# Altium PCB GSH_Bed v1.0.PcbDoc (part 4 of 6)
Units mil, origin at the board's own origin, x right, y up, seen from the top; angles counter-clockwise.
Board outline 4724.41 x 4921.3 mil, 2 copper layers (Top Layer, Bottom Layer); 2 components, 3 nets, 5 pads, 0 vias.
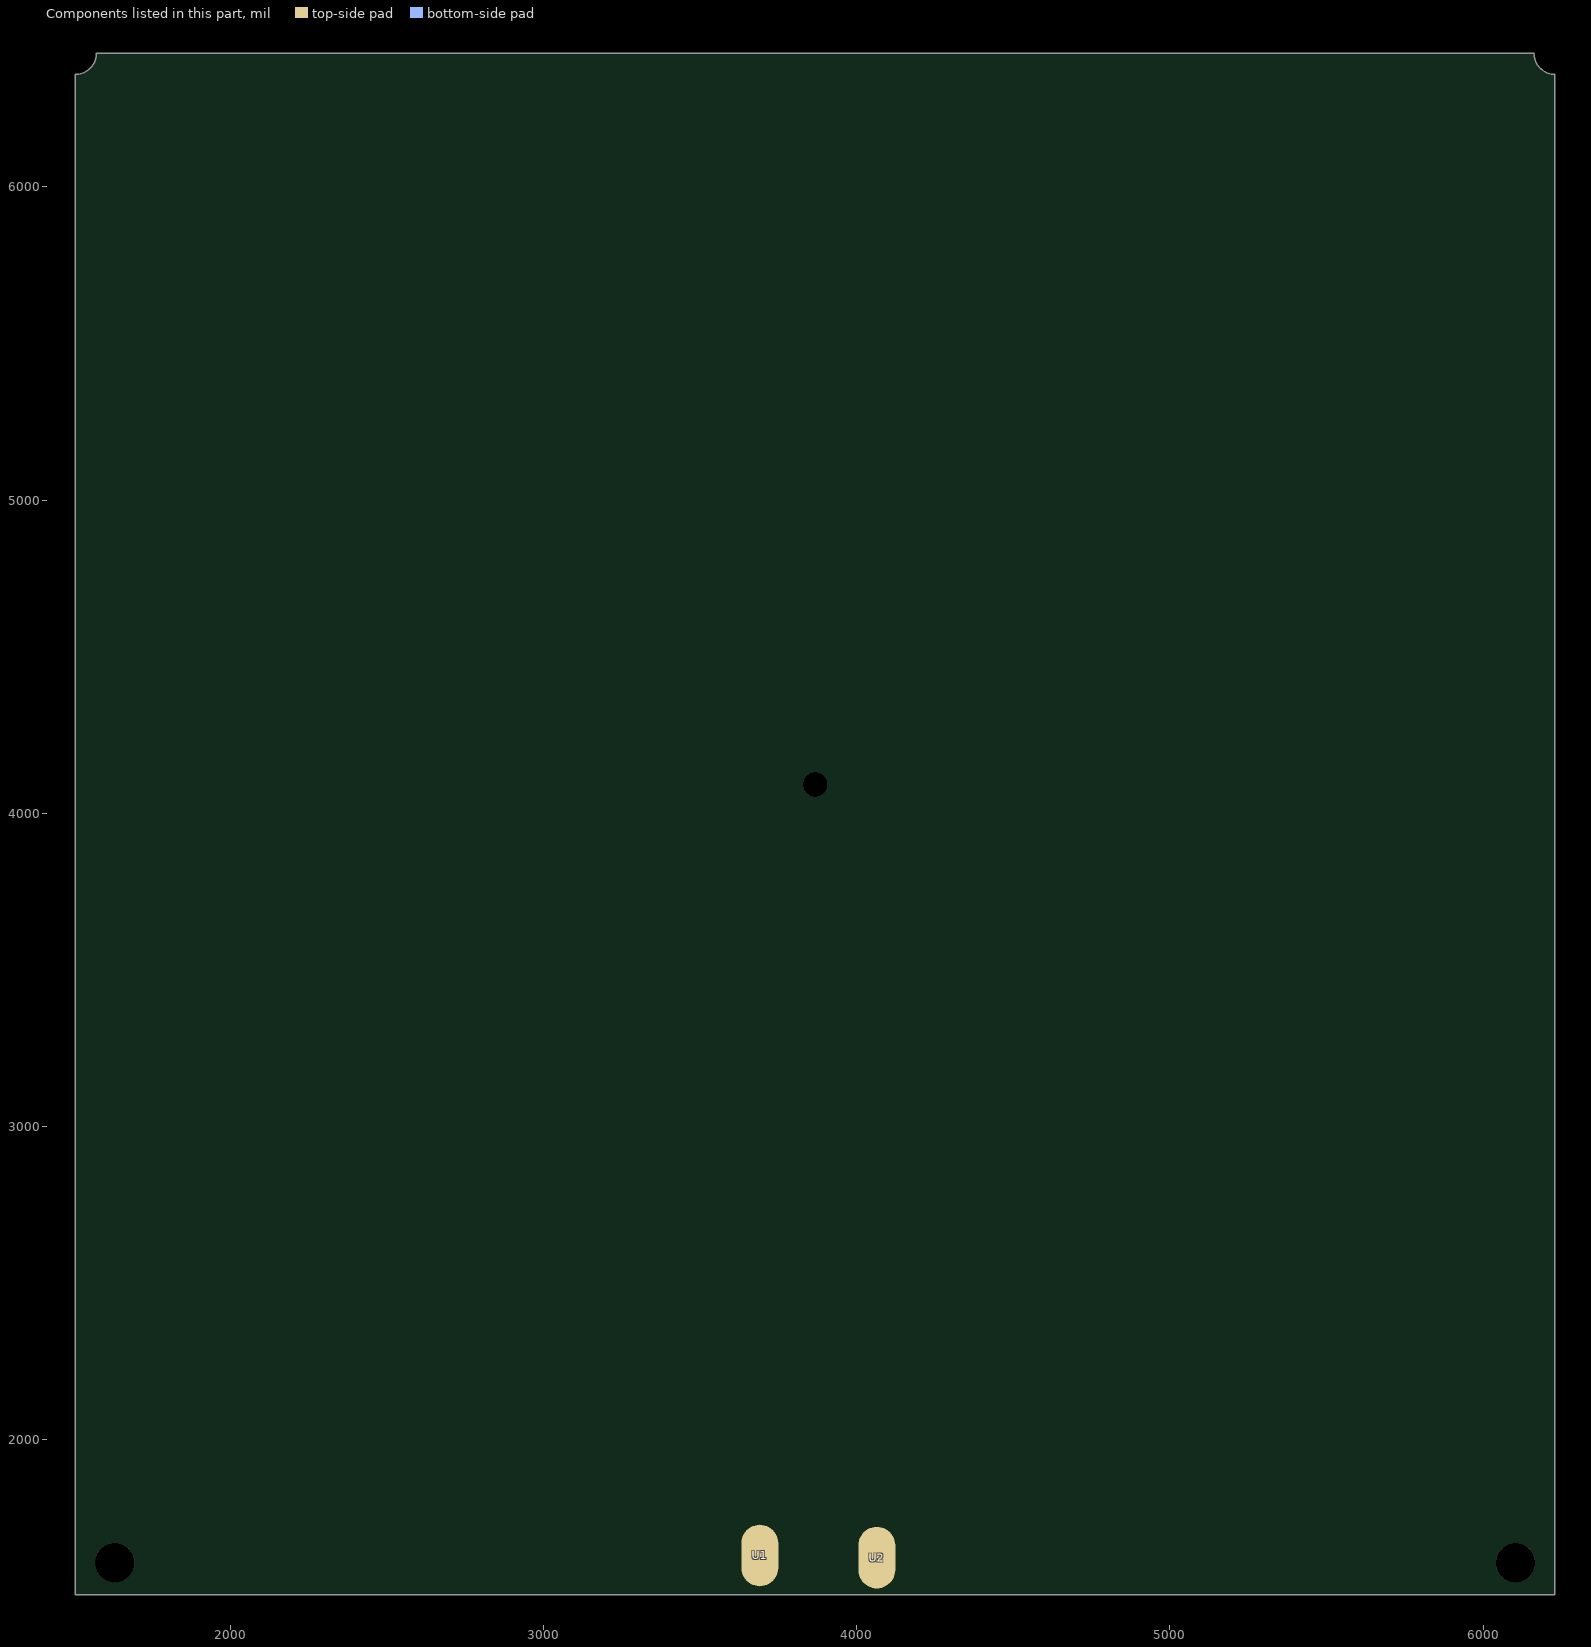
[diagram p4: the components of this part, seen from the top]

## Nets (pads, with @x,y where several pads share a name; then routed paths per layer and width w, separated by ;. In a path a pad name is that pad's centre, name@x,y a point inside that pad or via, vN(x,y) a via of type N, cw(c..) or ccw(c..) an arc to the next point about the centre after c; other vN are vias at no path point) (continued)
copper on no net: (continued)
  Top Layer w25.59: 3318.04,4737.17 3353.48,4737.17 3353.48,4701.73 3318.04,4701.73 3318.04,4630.87 3353.48,4630.87 3353.48,4666.3 3388.91,4666.3 3388.91,4630.87 3424.34,4630.87 3424.34,4701.73 3388.91,4701.73 3388.91,4737.17 3424.34,4737.17 3495.21,4737.17 3495.21,4701.73 3459.77,4701.73 3459.77,4630.86 3495.21,4630.86 3495.21,4666.29 3530.64,4666.29 3530.64,4630.86 3566.07,4630.86 3566.07,4701.73 3530.64,4701.73 3530.64,4737.16 3566.07,4737.16 3566.07,4808.03 3530.64,4808.03 3530.64,4772.6 3459.77,4772.6 3459.77,4808.03 3495.21,4808.03 3495.21,4843.46 3459.77,4843.46 3459.77,4878.89 3530.64,4878.89 3530.64,4843.46 3566.07,4843.46 3566.07,4878.89 3601.51,4878.89 3601.51,4843.47 3636.94,4843.47 3636.94,4878.89 3707.81,4878.89 3707.81,4843.47 3672.37,4843.47 3672.37,4808.03 3707.81,4808.03 3707.81,4772.6 3636.94,4772.6 3636.94,4808.03 3601.5,4808.03 3601.5,4737.17 3636.93,4737.17 3636.93,4701.72 3601.5,4701.72 3601.5,4630.86 3636.93,4630.86 3636.93,4666.29 3672.37,4666.29 3672.37,4630.86 3707.81,4630.86 3707.81,4701.72 3672.37,4701.72 3672.37,4737.16 3707.8,4737.16 3778.67,4737.16 3778.67,4701.72 3743.23,4701.72 3743.23,4630.85 3778.67,4630.85 3778.67,4666.29 3814.1,4666.29 3814.1,4630.85 3849.53,4630.85 3849.53,4701.72 3814.1,4701.72 3814.1,4737.16 3849.53,4737.16 3849.53,4808.02 3814.1,4808.02 3814.1,4772.59 3743.23,4772.59 3743.23,4808.02 3778.66,4808.02 3778.66,4843.45 3743.23,4843.45 3743.23,4878.89 3814.1,4878.89 3814.1,4843.45 3849.54,4843.45 3849.54,4878.89 3849.54,4914.32 3814.1,4914.32 3814.1,4949.76 3849.54,4949.76 3849.54,5020.62 3814.1,5020.62 3814.1,4985.19 3778.67,4985.19 3778.67,5020.62 3743.23,5020.62 3743.23,4949.76 3778.67,4949.76 3778.67,4914.33 3707.81,4914.33 3707.81,4949.76 3672.37,4949.76 3672.37,4914.32 3601.51,4914.32 3601.51,4949.76 3636.93,4949.76 3636.93,4985.19 3601.51,4985.19 3601.51,5020.62 3672.37,5020.62 3672.37,4985.19 3707.81,4985.19 3707.81,5056.06 3707.81,5091.49 3672.37,5091.49 3672.37,5056.05 3601.51,5056.05 3601.51,5091.49 3636.94,5091.49 3636.94,5126.92 3601.51,5126.92 3601.51,5162.36 3672.37,5162.36 3672.37,5126.92 3707.81,5126.92 3707.81,5162.36 3778.68,5162.36 3778.68,5126.92 3743.24,5126.92 3743.24,5056.05 3778.68,5056.05 3778.68,5091.48 3814.11,5091.48 3814.11,5056.05 3849.55,5056.05 3849.55,5126.92 3814.11,5126.92 3814.11,5162.35 3849.54,5162.35 3849.55,5233.21 3814.12,5233.21 3814.12,5197.78 3743.26,5197.78 3743.26,5233.21 3778.68,5233.21 3778.68,5268.65 3743.26,5268.65 3743.26,5304.08 3814.12,5304.08 3814.12,5268.65 3849.56,5268.65 3849.56,5339.51 3814.12,5339.51 3814.12,5374.95 3849.56,5374.95 3849.56,5445.81 3814.12,5445.81 3814.12,5410.38 3778.69,5410.38 3778.69,5445.81 3743.26,5445.81 3743.26,5374.95 3778.69,5374.95 3778.69,5339.51 3743.26,5339.51 3672.39,5339.51 3672.39,5374.95 3707.83,5374.95 3707.83,5445.82 3672.39,5445.82 3672.39,5410.39 3636.96,5410.39 3636.96,5445.82 3601.53,5445.82 3601.53,5374.95 3636.96,5374.95 3636.96,5339.52 3601.53,5339.52 3601.53,5268.65 3636.96,5268.65 3636.96,5304.09 3707.83,5304.09 3707.83,5268.65 3672.39,5268.65 3672.39,5233.22 3707.83,5233.22 3707.83,5197.79 3636.96,5197.79 3636.96,5233.22 3601.52,5233.22 3601.52,5197.79 3566.09,5197.79 3530.66,5197.79 3530.66,5233.23 3566.09,5233.23 3566.09,5304.09 3530.66,5304.09 3530.66,5268.66 3495.22,5268.66 3495.22,5304.09 3459.79,5304.09 3459.79,5233.23 3495.22,5233.23 3495.22,5197.79 3424.36,5197.79 3424.36,5233.23 3388.92,5233.23 3388.92,5197.79 3318.06,5197.79 3318.06,5233.23 3353.49,5233.23 3353.49,5268.65 3318.06,5268.65 3318.06,5304.09 3388.92,5304.09 3388.92,5268.65 3424.36,5268.65 3424.36,5339.52 3424.36,5374.95 3388.93,5374.95 3388.93,5339.52 3318.07,5339.52 3318.07,5374.95 3353.49,5374.95 3353.49,5410.39 3318.07,5410.39 3318.07,5445.82 3388.93,5445.82 3388.93,5410.39 3424.37,5410.39 3424.37,5445.82 3495.23,5445.82 3495.23,5410.38 3459.8,5410.38 3459.8,5339.52 3495.23,5339.52 3495.23,5374.95 3530.67,5374.95 3530.67,5339.52 3566.1,5339.52 3566.1,5410.38 3530.67,5410.38 3530.67,5445.82 3566.1,5445.81 3566.1,5481.25 3530.66,5481.25 3530.66,5516.69 3566.1,5516.69 3566.1,5587.55 3530.66,5587.55 3530.66,5552.12 3495.23,5552.12 3495.23,5587.55 3459.8,5587.55 3459.8,5516.69 3495.23,5516.69 3495.23,5481.25 3424.36,5481.25 3424.36,5516.68 3388.93,5516.68 3388.93,5481.25 3318.07,5481.25 3318.07,5516.68 3353.5,5516.68 3353.5,5552.12 3318.07,5552.12 3318.07,5587.55 3388.93,5587.55 3388.93,5552.12 3424.37,5552.12 3424.37,5622.98 3424.37,5658.42 3388.93,5658.42 3388.93,5622.98 3318.07,5622.98 3318.07,5658.42 3353.5,5658.42 3353.5,5693.85 3318.07,5693.85 3318.07,5729.28 3388.93,5729.28 3388.93,5693.85 3424.37,5693.85 3424.37,5729.28 ; 3318.04,4737.18 3318.04,4808.04 3353.48,4808.04 3353.48,4772.6 3424.34,4772.6 3424.34,4808.04 3388.91,4808.04 3388.91,4843.47 3424.34,4843.47 3424.34,4878.9 3353.48,4878.9 3353.48,4843.47 3318.05,4843.47 3318.05,4914.34 3353.48,4914.33 3353.48,4949.77 3318.05,4949.77 3318.05,5020.63 3353.48,5020.63 3353.48,4985.2 3388.91,4985.2 3388.91,5020.63 3424.35,5020.63 3424.35,4949.77 3388.91,4949.77 3388.91,4914.33 3459.78,4914.33 3459.78,4949.76 3495.22,4949.76 3495.22,4914.33 3566.08,4914.33 3566.08,4949.76 3530.65,4949.76 3530.65,4985.2 3566.08,4985.2 3566.08,5020.63 3495.22,5020.63 3495.22,4985.2 3459.79,4985.2 3459.79,5020.63 3459.79,5091.5 3495.22,5091.5 3495.22,5056.06 3566.09,5056.06 3566.09,5091.5 3530.66,5091.5 3530.66,5126.93 3566.09,5126.93 3566.09,5162.36 3495.22,5162.36 3495.22,5126.93 3459.79,5126.93 3459.79,5162.36 3388.92,5162.36 3388.92,5126.93 3424.36,5126.93 3424.36,5056.06 3388.92,5056.06 3388.92,5091.49 3353.49,5091.49 3353.49,5056.06 3318.06,5056.06 3318.06,5126.93 3353.49,5126.93 3353.49,5162.37 3318.06,5162.37 3282.63,5162.37 3282.63,5126.93 3247.19,5126.93 3247.19,5162.37 3176.32,5162.37 3176.32,5126.93 3211.76,5126.93 3211.76,5091.5 3176.32,5091.5 3176.32,5056.07 3247.19,5056.07 3247.19,5091.5 3282.62,5091.5 3282.62,5020.63 3247.19,5020.63 3247.19,4985.2 3282.62,4985.2 3282.62,4914.33 3247.19,4914.33 3247.19,4949.77 3211.76,4949.77 3211.76,4914.33 3176.32,4914.33 3176.32,4985.2 3211.76,4985.2 3211.76,5020.64 3140.89,5020.64 3105.46,5020.64 3105.46,4985.2 3140.89,4985.2 3140.89,4914.34 3105.46,4914.34 3105.46,4949.77 3070.03,4949.77 3070.03,4914.34 3034.59,4914.34 3034.59,4985.2 3070.03,4985.2 3070.03,5020.64 3034.59,5020.64 3034.59,5091.51 3070.03,5091.51 3070.03,5056.08 3140.89,5056.08 3140.89,5091.51 3105.47,5091.51 3105.47,5126.94 3140.89,5126.94 3140.89,5162.38 3070.03,5162.38 3070.03,5126.94 3034.6,5126.94 3034.6,5162.38 2963.73,5162.38 2963.73,5126.94 2999.17,5126.94 2999.17,5056.08 2963.73,5056.08 2963.73,5091.51 2928.3,5091.51 2928.3,5056.08 2892.87,5056.08 2892.87,5126.94 2928.3,5126.94 2928.3,5162.38 2857.44,5162.38 2857.43,5126.95 2821.99,5126.95 2821.99,5162.38 2751.13,5162.38 2751.13,5126.95 2786.56,5126.95 2786.56,5091.52 2751.13,5091.52 2751.13,5056.08 2821.99,5056.08 2821.99,5091.52 2857.43,5091.52 2857.43,5056.08 2857.43,4985.22 2821.99,4985.22 2821.99,5020.65 2751.13,5020.65 2751.13,4985.22 2786.56,4985.22 2786.56,4949.78 2751.13,4949.78 2751.13,4914.35 2821.99,4914.35 2821.99,4949.78 2857.43,4949.78 2857.43,4914.35 2928.29,4914.35 2928.29,4949.79 2892.86,4949.79 2892.86,5020.65 2928.29,5020.65 2928.29,4985.22 2963.72,4985.22 2963.72,5020.65 2999.16,5020.65 2999.16,4949.79 2963.72,4949.79 2963.72,4914.35 2999.16,4914.35 2999.16,4878.91 2963.73,4878.92 2963.73,4843.48 2999.16,4843.48 2999.16,4772.62 2963.73,4772.62 2963.73,4808.05 2928.29,4808.05 2928.29,4772.62 2892.86,4772.62 2892.86,4843.48 2928.29,4843.48 2928.29,4878.92 2857.43,4878.92 2857.43,4843.49 2821.99,4843.49 2821.99,4878.92 2751.13,4878.92 2751.13,4843.49 2786.56,4843.49 2786.56,4808.05 2751.13,4808.05 2751.13,4772.62 2821.99,4772.62 2821.99,4808.05 2857.42,4808.05 2857.42,4772.62 2857.42,4701.75 2821.98,4701.75 2821.98,4737.19 2751.12,4737.19 2751.12,4701.75 2786.55,4701.75 2786.55,4666.32 2751.12,4666.32 2751.12,4630.89 2821.98,4630.89 2821.98,4666.32 2857.42,4666.32 2857.42,4630.89 2928.28,4630.89 2928.28,4666.32 2892.85,4666.32 2892.85,4737.19 2928.28,4737.19 2928.28,4701.76 2963.72,4701.76 2963.72,4737.19 2999.15,4737.19 2999.15,4666.32 2963.72,4666.32 2963.72,4630.88 2999.15,4630.88 3034.58,4630.88 3034.58,4666.32 3070.02,4666.32 3070.02,4630.88 3140.89,4630.88 3140.89,4666.32 3105.45,4666.32 3105.45,4701.75 3140.89,4701.75 3140.89,4737.19 3070.02,4737.19 3070.02,4701.75 3034.59,4701.75 3034.59,4772.62 3070.02,4772.62 3070.02,4808.05 3034.59,4808.05 3034.59,4878.92 3070.02,4878.92 3070.02,4843.49 3105.45,4843.49 3105.45,4878.92 3140.89,4878.92 3140.89,4808.05 3105.45,4808.05 3105.45,4772.61 3176.32,4772.61 3211.75,4772.61 3211.75,4808.05 3176.32,4808.05 3176.32,4878.91 3211.75,4878.91 3211.75,4843.48 3247.18,4843.48 3247.18,4878.91 3282.62,4878.91 3282.62,4808.05 3247.18,4808.05 3247.18,4772.61 3282.62,4772.61 3282.62,4701.74 3247.18,4701.74 3247.18,4737.18 3176.32,4737.18 3176.32,4701.74 3211.75,4701.74 3211.75,4666.31 3176.32,4666.31 3176.32,4630.87 3247.18,4630.87 3247.18,4666.31 3282.61,4666.31 3282.61,4595.44 3282.61,4560.01 3247.17,4560.01 3247.17,4595.44 3176.3,4595.44 3176.3,4560.01 3211.73,4560.01 3211.73,4524.58 3176.3,4524.58 3176.3,4489.14 3247.17,4489.14 3247.17,4524.58 3282.6,4524.58 3282.6,4453.71 3247.17,4453.71 3247.17,4418.28 3282.6,4418.28 3282.6,4347.41 3247.17,4347.41 3247.17,4382.85 3211.74,4382.85 3211.74,4347.41 3176.3,4347.41 3176.3,4418.28 3211.74,4418.28 3211.74,4453.72 3140.87,4453.72 3105.44,4453.72 3105.44,4418.28 3140.87,4418.28 3140.87,4347.42 3105.44,4347.42 3105.44,4382.85 3070.01,4382.85 3070.01,4347.42 3034.57,4347.42 3034.57,4418.28 3070.01,4418.28 3070.01,4453.72 3034.57,4453.72 3034.57,4524.59 3070.01,4524.59 3070.01,4489.15 3140.87,4489.15 3140.87,4524.59 3105.44,4524.59 3105.44,4560.02 3140.87,4560.02 3140.87,4595.45 3070.01,4595.45 3070.01,4560.02 3034.58,4560.02 3034.58,4595.45 2963.71,4595.45 2963.71,4560.02 2999.15,4560.02 2999.15,4489.16 2963.71,4489.16 2963.71,4524.59 2928.28,4524.59 2928.28,4489.16 2892.84,4489.16 2892.84,4560.02 2928.28,4560.02 2928.28,4595.46 2857.41,4595.46 2857.41,4560.02 2821.97,4560.02 2821.97,4595.46 2751.11,4595.46 2751.11,4560.02 2786.54,4560.02 2786.54,4524.59 2751.11,4524.59 2751.11,4489.16 2821.97,4489.16 2821.97,4524.59 2857.41,4524.59 2857.41,4489.16 2857.41,4418.29 2821.97,4418.29 2821.97,4453.73 2751.1,4453.73 2751.1,4418.29 2786.54,4418.29 2786.54,4382.86 2751.1,4382.86 2751.1,4347.43 2821.97,4347.43 2821.97,4382.86 2857.4,4382.86 2857.4,4347.43 2928.27,4347.43 2928.27,4382.86 2892.84,4382.86 2892.84,4453.73 2928.27,4453.73 2928.27,4418.3 2963.7,4418.3 2963.7,4453.73 2999.14,4453.73 2999.14,4382.86 2963.7,4382.86 2963.7,4347.43 2999.14,4347.43 2999.14,4311.99 2963.7,4311.99 2963.7,4276.56 2999.14,4276.56 2999.14,4205.7 2963.7,4205.7 2963.7,4241.13 2928.27,4241.13 2928.27,4205.7 2892.84,4205.7 2892.84,4276.56 2928.27,4276.56 2928.27,4312 2857.41,4312 2857.41,4276.56 2821.97,4276.56 2821.97,4312 2751.1,4312 2751.1,4276.56 2786.53,4276.56 2786.53,4241.13 2751.1,4241.13 2751.1,4205.7 2821.97,4205.7 2821.97,4241.13 2857.4,4241.13 2857.4,4205.7 2857.4,4134.83 2821.96,4134.83 2821.96,4170.27 2751.1,4170.27 2751.1,4134.83 2786.53,4134.83 2786.53,4099.4 2751.1,4099.4 2751.1,4063.97 2821.96,4063.97 2821.96,4099.4 2857.4,4099.4 2857.4,4063.97 2928.26,4063.97 2928.26,4099.4 2892.83,4099.4 2892.83,4170.27 2928.26,4170.27 2928.26,4134.84 2963.7,4134.84 2963.7,4170.27 2999.13,4170.27 2999.13,4099.4 2963.7,4099.4 2963.7,4063.97 2999.13,4063.97 3034.56,4063.97 3034.56,4099.4 3070,4099.4 3070,4063.97 3140.86,4063.97 3140.86,4099.4 3105.43,4099.4 3105.43,4134.83 3140.86,4134.83 3140.86,4170.27 3070,4170.27 3070,4134.83 3034.57,4134.83 3034.57,4205.7 3070,4205.7 3070,4241.13 3034.56,4241.13 3034.56,4312 3070,4312 3070,4276.56 3105.43,4276.56 3105.43,4312 3140.86,4312 3140.86,4241.13 3105.43,4241.13 3105.43,4205.69 3176.3,4205.69 3211.73,4205.69 3211.73,4241.13 3176.3,4241.13 3176.3,4311.99 3211.73,4311.99 3211.73,4276.56 3247.16,4276.56 3247.16,4311.99 3282.6,4311.99 3282.6,4241.13 3247.16,4241.13 3247.16,4205.69 3282.6,4205.69 3282.6,4134.82 3247.16,4134.82 3247.16,4170.26 3176.3,4170.26 3176.3,4134.82 3211.72,4134.82 3211.72,4099.39 3176.3,4099.39 3176.3,4063.95 3247.16,4063.95 3247.16,4099.39 3282.59,4099.39 3282.59,4063.96 3353.45,4063.95 3353.45,4099.39 3318.02,4099.39 3318.02,4170.25 3353.45,4170.25 3353.45,4134.82 3388.89,4134.82 3388.89,4170.25 3424.32,4170.25 3424.32,4099.39 3388.89,4099.39 3388.89,4063.95 3459.75,4063.95 3459.75,4099.39 3495.19,4099.39 3495.19,4063.95 3566.06,4063.95 3566.06,4099.39 3530.63,4099.39 3530.63,4134.82 3566.06,4134.82 3566.06,4170.25 3495.19,4170.25 3495.19,4134.82 3459.76,4134.82 3459.76,4170.25 3459.76,4241.12 3495.2,4241.12 3495.2,4205.68 3566.06,4205.68 3566.06,4241.12 3530.63,4241.12 3530.63,4276.55 3566.06,4276.55 3566.06,4311.98 3495.2,4311.98 3495.2,4276.55 3459.76,4276.55 3459.76,4311.98 3388.9,4311.98 3388.9,4276.55 3424.33,4276.55 3424.33,4205.68 3388.9,4205.68 3388.9,4241.11 3353.47,4241.11 3353.47,4205.68 3318.03,4205.68 3318.03,4276.55 3353.47,4276.55 3353.47,4311.98 3318.03,4311.98 3318.03,4347.41 3318.03,4382.85 3353.47,4382.85 3353.47,4347.42 3424.33,4347.42 3424.33,4382.85 3388.9,4382.85 3388.9,4418.28 3424.33,4418.28 3424.33,4453.72 3353.47,4453.72 3353.47,4418.28 3318.04,4418.28 3318.04,4489.15 3353.47,4489.15 3353.47,4524.59 3318.03,4524.59 3318.03,4595.45 3353.47,4595.45 3353.47,4560.02 3388.9,4560.02 3388.9,4595.45 3424.33,4595.45 3424.33,4524.59 3388.9,4524.59 3388.9,4489.15 3459.77,4489.15 3495.2,4489.15 3495.2,4524.58 3459.76,4524.58 3459.76,4595.44 3495.2,4595.44 3495.2,4560.01 3530.63,4560.01 3530.63,4595.44 3566.07,4595.44 3566.07,4524.58 3530.63,4524.58 3530.63,4489.14 3566.07,4489.14 3566.07,4418.27 3530.63,4418.27 3530.63,4453.71 3459.76,4453.71 3459.76,4418.27 3495.19,4418.27 3495.19,4382.84 3459.76,4382.84 3459.76,4347.41 3530.63,4347.41 3530.63,4382.84 3566.06,4382.84 3566.06,4347.41 3601.49,4347.41 3601.49,4382.85 3636.93,4382.85 3636.93,4347.41 3707.79,4347.41 3707.79,4382.85 3672.36,4382.85 3672.36,4418.28 3707.79,4418.28 3707.79,4453.71 3636.93,4453.71 3636.93,4418.28 3601.49,4418.28 3601.49,4489.14 3636.93,4489.14 3636.93,4524.58 3601.49,4524.58 3601.49,4595.44 3636.93,4595.44 3636.93,4560.01 3672.36,4560.01 3672.36,4595.44 3707.79,4595.44 3707.79,4524.58 3672.36,4524.58 3672.36,4489.14 3743.23,4489.14 3778.66,4489.14 3778.66,4524.57 3743.22,4524.57 3743.22,4595.44 3778.66,4595.44 3778.66,4560.01 3814.09,4560.01 3814.09,4595.44 3849.53,4595.44 3849.53,4524.57 3814.09,4524.57 3814.09,4489.13 3849.53,4489.13 3849.53,4418.27 3814.09,4418.27 3814.09,4453.7 3743.22,4453.7 3743.22,4418.27 3778.65,4418.27 3778.65,4382.84 3743.22,4382.84 3743.22,4347.4 3814.09,4347.4 3814.09,4382.84 3849.52,4382.84 3849.52,4311.97 3814.09,4311.97 3814.09,4276.54 3849.52,4276.54 3849.52,4205.67 3814.09,4205.67 3814.09,4241.1 3778.65,4241.1 3778.65,4205.67 3743.22,4205.67 3743.22,4276.54 3778.65,4276.54 3778.65,4311.98 3707.79,4311.98 3707.79,4276.54 3672.35,4276.54 3672.35,4311.98 3601.49,4311.98 3601.49,4276.54 3636.91,4276.54 3636.91,4241.11 3601.49,4241.11 3601.49,4205.67 3672.35,4205.67 3672.35,4241.11 3707.78,4241.11 3707.78,4205.68 3707.78,4134.81 3672.34,4134.81 3672.34,4170.24 3601.48,4170.24 3601.48,4134.81 3636.91,4134.81 3636.91,4099.38 3601.48,4099.38 3601.48,4063.94 3672.34,4063.94 3672.34,4099.38 3707.78,4099.38 3707.78,4063.95 3778.64,4063.95 3778.64,4099.38 3743.21,4099.38 3743.21,4170.24 3778.64,4170.24 3778.64,4134.81 3814.08,4134.81 3814.08,4170.24 3849.51,4170.24 3920.38,4170.23 3920.38,4134.8 3955.81,4134.8 3955.81,4170.23 3991.25,4170.23 3991.25,4099.36 3955.81,4099.36 3955.81,4063.93 4026.68,4063.93 4026.68,4099.36 4062.12,4099.36 4062.12,4063.93 4132.98,4063.93 4132.98,4099.36 4097.55,4099.36 4097.55,4134.8 4132.98,4134.8 4132.98,4170.23 4062.12,4170.23 4062.12,4134.8 4026.68,4134.8 4026.68,4170.23 4026.68,4241.1 4062.12,4241.1 4062.12,4205.66 4132.98,4205.66 4132.98,4241.1 4097.56,4241.1 4097.56,4276.52 4132.98,4276.52 4132.98,4311.96 4062.12,4311.96 4062.12,4276.52 4026.68,4276.52 4026.68,4311.95 3955.82,4311.95 3955.82,4276.52 3991.26,4276.52 3991.26,4205.66 3955.82,4205.66 3955.82,4241.1 3920.39,4241.1 3920.39,4205.66 3884.95,4205.66 3884.95,4276.52 3920.39,4276.52 3920.39,4311.96 3884.95,4311.96 3884.95,4347.39 3884.95,4382.83 3920.39,4382.83 3920.39,4347.39 3991.26,4347.39 3991.26,4382.83 3955.83,4382.83 3955.83,4418.26 3991.26,4418.26 3991.26,4453.69 3920.39,4453.69 3920.39,4418.26 3884.96,4418.26 3884.96,4489.13 3920.39,4489.13 3920.39,4524.56 3884.96,4524.56 3884.96,4595.43 3920.39,4595.43 3920.39,4560 3955.82,4560 3955.82,4595.43 3991.26,4595.43 3991.26,4524.56 3955.82,4524.56 3955.82,4489.12 4026.69,4489.12 4062.12,4489.12 4062.12,4524.56 4026.68,4524.56 4026.68,4595.42 4062.12,4595.42 4062.12,4559.99 4097.56,4559.99 4097.56,4595.42 4132.99,4595.42 4132.99,4524.56 4097.56,4524.56 4097.56,4489.11 4132.99,4489.11 4132.99,4418.25 4097.55,4418.25 4097.55,4453.69 4026.68,4453.69 4026.68,4418.25 4062.12,4418.25 4062.12,4382.82 4026.68,4382.82 4026.68,4347.39 4097.55,4347.39 4097.55,4382.82 4132.98,4382.82 4132.98,4347.39 4168.42,4347.39 4168.42,4382.82 4203.85,4382.82 4203.85,4347.39 4274.72,4347.39 4274.72,4382.82 4239.29,4382.82 4239.29,4418.25 4274.72,4418.25 4274.72,4453.69 4203.85,4453.69 4203.85,4418.25 4168.42,4418.25 4168.42,4489.12 4203.85,4489.12 4203.85,4524.56 4168.42,4524.56 4168.42,4595.42 4203.85,4595.42 4203.85,4559.99 4239.29,4559.99 4239.29,4595.42 4274.72,4595.42 4274.72,4524.56 4239.29,4524.56 4239.29,4489.11 4310.15,4489.11 4345.59,4489.11 4345.59,4524.55 4310.15,4524.55 4310.15,4595.41 4345.59,4595.41 4345.59,4559.98 4381.01,4559.98 4381.01,4595.41 4416.45,4595.41 4416.45,4524.55 4381.01,4524.55 4381.01,4489.11 4416.45,4489.11 4416.45,4418.24 4381.01,4418.24 4381.01,4453.68 4310.15,4453.68 4310.15,4418.24 4345.58,4418.24 4345.58,4382.81 4310.15,4382.81 4310.15,4347.38 4381.01,4347.38 4381.01,4382.81 4416.44,4382.81 4416.44,4311.94 4381.01,4311.95 4381.01,4276.52 4416.44,4276.52 4416.44,4205.65 4381.01,4205.65 4381.01,4241.08 4345.58,4241.08 4345.58,4205.65 4310.14,4205.65 4310.14,4276.52 4345.58,4276.52 4345.58,4311.95 4274.72,4311.95 4274.71,4276.52 4239.27,4276.52 4239.27,4311.95 4168.41,4311.95 4168.41,4276.52 4203.84,4276.52 4203.84,4241.09 4168.41,4241.09 4168.41,4205.65 4239.27,4205.65 4239.27,4241.09 4274.71,4241.09 4274.71,4205.65 4274.71,4134.79 4239.27,4134.79 4239.27,4170.22 4168.4,4170.22 4168.4,4134.79 4203.84,4134.79 4203.84,4099.35 4168.4,4099.35 4168.4,4063.92 4239.27,4063.92 4239.27,4099.35 4274.7,4099.35 4274.7,4063.92 4345.56,4063.92 4345.56,4099.35 4310.14,4099.35 4310.14,4170.22 4345.56,4170.22 4345.56,4134.79 4381,4134.79 4381,4170.22 4416.43,4170.22 4416.43,4099.35 4381,4099.35 4381,4063.92 4416.43,4063.92 4451.86,4063.92 4451.86,4099.35 4487.3,4099.35 4487.3,4063.92 4558.17,4063.92 4558.17,4099.35 4522.73,4099.35 4522.73,4134.78 4558.17,4134.78 4558.17,4170.22 4487.3,4170.22 4487.3,4134.78 4451.87,4134.78 4451.87,4205.65 4487.3,4205.65 4487.3,4241.09 4451.86,4241.09 4451.86,4311.95 4487.3,4311.95 4487.3,4276.52 4522.73,4276.52 4522.73,4311.95 4558.17,4311.95 4558.17,4241.09 4522.73,4241.09 4522.73,4205.64 4593.6,4205.64 4629.03,4205.64 4629.03,4241.08 4593.6,4241.08 4593.6,4311.94 4629.03,4311.94 4629.03,4276.51 4664.46,4276.51 4664.46,4311.94 4699.9,4311.94 4699.9,4241.08 4664.46,4241.08 4664.46,4205.64 4699.9,4205.64 4699.9,4134.77 4664.46,4134.77 4664.46,4170.21 4593.6,4170.21 4593.6,4134.77 4629.03,4134.77 4629.03,4099.34 4593.6,4099.34 4593.6,4063.91 4664.46,4063.91 4664.46,4099.34 4699.89,4099.34 4699.89,4063.91 4770.76,4063.91 4770.76,4099.34 4735.32,4099.34 4735.32,4170.2 4770.76,4170.2 4770.76,4134.77 4806.19,4134.77 4806.19,4170.2 4841.62,4170.2 4841.62,4099.34 4806.19,4099.34 4806.19,4063.9 4877.05,4063.9 4877.05,4099.34 4912.49,4099.34 4912.49,4063.9 4983.36,4063.9 4983.36,4099.34 4947.93,4099.34 4947.93,4134.77 4983.36,4134.77 4983.36,4170.2 4912.49,4170.2 4912.49,4134.77 4877.06,4134.77 4877.06,4170.2 4877.06,4241.06 4912.5,4241.06 4912.5,4205.63 4983.36,4205.63 4983.36,4241.06 4947.93,4241.06 4947.93,4276.5 4983.36,4276.5 4983.36,4311.94 4912.5,4311.94 4912.5,4276.5 4877.06,4276.5 4877.06,4311.93 4806.2,4311.93 4806.2,4276.49 4841.63,4276.49 4841.63,4205.63 4806.2,4205.63 4806.2,4241.06 4770.77,4241.06 4770.77,4205.63 4735.33,4205.63 4735.33,4276.49 4770.77,4276.49 4770.77,4311.94 4735.33,4311.94 4735.33,4347.37 4770.77,4347.36 4770.77,4382.8 4735.33,4382.8 4735.33,4453.66 4770.77,4453.66 4770.77,4418.23 4806.19,4418.23 4806.19,4453.66 4841.63,4453.66 4841.63,4382.8 4806.19,4382.8 4806.19,4347.36 4877.06,4347.36 4877.06,4382.79 4912.5,4382.79 4912.5,4347.36 4983.36,4347.36 4983.36,4382.79 4947.93,4382.79 4947.93,4418.23 4983.36,4418.23 4983.36,4453.66 4912.5,4453.66 4912.5,4418.23 4877.07,4418.23 4877.07,4453.66 4877.07,4524.53 4912.51,4524.53 4912.51,4489.09 4983.37,4489.09 4983.37,4524.53 4947.94,4524.53 4947.94,4559.96 4983.37,4559.96 4983.37,4595.39 4912.51,4595.39 4912.51,4559.96 4877.07,4559.96 4877.07,4595.39 4806.2,4595.39 4806.2,4559.96 4841.64,4559.96 4841.64,4489.09 4806.2,4489.09 4806.2,4524.52 4770.77,4524.52 4770.77,4489.09 4735.34,4489.09 4735.34,4559.96 4770.77,4559.96 4770.77,4595.4 4735.34,4595.4 4699.91,4595.4 4699.91,4559.96 4664.47,4559.96 4664.47,4595.4 4593.6,4595.4 4593.6,4559.96 4629.04,4559.96 4629.04,4524.53 4593.6,4524.53 4593.6,4489.09 4664.47,4489.09 4664.47,4524.53 4699.9,4524.53 4699.9,4453.66 4664.47,4453.66 4664.47,4418.23 4699.91,4418.23 4699.91,4347.36 4664.47,4347.36 4664.47,4382.79 4629.04,4382.79 4629.04,4347.36 4593.6,4347.36 4593.6,4418.23 4629.04,4418.23 4629.04,4453.67 4558.17,4453.67 4522.74,4453.67 4522.74,4418.23 4558.17,4418.23 4558.17,4347.37 4522.74,4347.37 4522.74,4382.8 4487.31,4382.8 4487.31,4347.37 4451.87,4347.37 4451.87,4418.23 4487.31,4418.23 4487.31,4453.67 4451.87,4453.67 4451.87,4524.54 4487.31,4524.54 4487.31,4489.1 4558.17,4489.1 4558.17,4524.54 4522.74,4524.54 4522.74,4559.97 4558.17,4559.97 4558.17,4595.41 4487.31,4595.41 4487.31,4559.97 4451.88,4559.97 4451.88,4630.84 4451.88,4666.27 4487.32,4666.27 4487.32,4630.84 4558.19,4630.84 4558.19,4666.27 4522.76,4666.27 4522.76,4701.7 4558.19,4701.7 4558.19,4737.14 4487.32,4737.14 4487.32,4701.7 4451.89,4701.7 4451.89,4772.57 4487.32,4772.57 4487.32,4808 4451.89,4808 4451.89,4878.87 4487.32,4878.87 4487.32,4843.44 4522.75,4843.44 4522.75,4878.87 4558.19,4878.87 4558.19,4808 4522.75,4808 4522.75,4772.57 4593.62,4772.57 4629.05,4772.57 4629.05,4808 4593.62,4808 4593.62,4878.86 4629.05,4878.86 4629.05,4843.43 4664.49,4843.43 4664.49,4878.86 4699.92,4878.86 4699.92,4808 4664.49,4808 4664.49,4772.56 4699.92,4772.56 4699.92,4701.69 4664.48,4701.69 4664.48,4737.13 4593.62,4737.13 4593.62,4701.69 4629.05,4701.69 4629.05,4666.26 4593.62,4666.26 4593.62,4630.83 4664.48,4630.83 4664.48,4666.26 4699.92,4666.26 4699.91,4630.83 4770.78,4630.83 4770.78,4666.26 4735.35,4666.26 4735.35,4737.12 4770.78,4737.12 4770.78,4701.69 4806.21,4701.69 4806.21,4737.12 4841.64,4737.12 4841.64,4666.26 4806.21,4666.26 4806.21,4630.82 4877.07,4630.82 ; 4133.04,6189.87 4133.04,6119.01 4097.6,6119.01 4097.6,6154.44 4026.74,6154.44 4026.74,6119.01 4062.17,6119.01 4062.17,6083.58 4026.74,6083.58 4026.74,6048.14 4097.6,6048.14 4097.6,6083.58 4133.04,6083.58 4133.03,6048.14 4168.47,6048.14 4168.47,6083.58 4203.9,6083.58 4203.9,6048.14 4274.77,6048.14 4274.77,6083.58 4239.34,6083.58 4239.34,6119.02 4274.77,6119.02 4274.77,6154.45 4203.9,6154.45 4203.9,6119.02 4168.47,6119.02 4168.47,6189.88 4203.9,6189.88 4203.9,6225.31 4168.47,6225.31 4168.47,6296.18 4203.9,6296.18 4203.9,6260.75 4239.34,6260.75 4239.34,6296.18 4274.77,6296.18 4274.77,6225.31 4239.34,6225.31 4239.34,6189.87 4310.2,6189.87 4345.63,6189.87 4345.63,6225.31 4310.2,6225.31 4310.2,6296.17 4345.63,6296.17 4345.63,6260.74 4381.06,6260.74 4381.06,6296.17 4416.5,6296.17 4416.5,6225.31 4381.06,6225.31 4381.06,6189.87 4416.5,6189.87 4416.5,6119.01 4381.06,6119.01 4381.06,6154.44 4310.2,6154.44 4310.2,6119.01 4345.63,6119.01 4345.63,6083.57 4310.2,6083.57 4310.2,6048.14 4381.06,6048.14 4381.06,6083.57 4416.49,6083.57 4416.49,6012.71 4381.06,6012.71 4381.06,5977.27 4416.49,5977.27 4416.49,5906.41 4381.06,5906.41 4381.06,5941.84 4345.63,5941.84 4345.63,5906.41 4310.19,5906.41 4310.19,5977.27 4345.63,5977.27 4345.63,6012.71 4274.76,6012.71 4274.76,5977.27 4239.32,5977.27 4239.32,6012.71 4168.46,6012.71 4168.46,5977.27 4203.89,5977.27 4203.89,5941.85 4168.46,5941.85 4168.46,5906.41 4239.32,5906.41 4239.32,5941.85 4274.76,5941.85 4274.76,5906.41 4274.76,5835.55 4239.31,5835.55 4239.31,5870.98 4168.45,5870.98 4168.45,5835.55 4203.89,5835.55 4203.89,5800.11 4168.45,5800.11 4168.45,5764.68 4239.31,5764.68 4239.31,5800.11 4274.75,5800.11 4274.75,5764.68 4345.62,5764.68 4345.62,5800.12 4310.18,5800.12 4310.18,5870.98 4345.62,5870.98 4345.62,5835.55 4381.05,5835.55 4381.05,5870.98 4416.48,5870.98 4416.48,5800.12 4381.05,5800.12 4381.05,5764.68 4416.48,5764.68 4487.35,5764.67 4487.35,5800.1 4451.91,5800.1 4451.91,5870.97 4487.35,5870.97 4487.35,5835.54 4522.78,5835.54 4522.78,5870.97 4558.22,5870.97 4558.22,5800.1 4522.78,5800.1 4522.78,5764.66 4593.65,5764.66 4593.65,5800.1 4629.09,5800.1 4629.09,5764.66 4699.95,5764.66 4699.95,5800.1 4664.52,5800.1 4664.52,5835.53 4699.95,5835.53 4699.95,5870.97 4629.09,5870.97 4629.09,5835.53 4593.66,5835.53 4593.66,5870.96 4593.66,5941.83 4629.1,5941.83 4629.1,5906.4 4699.96,5906.4 4699.96,5941.83 4664.53,5941.83 4664.53,5977.26 4699.96,5977.26 4699.96,6012.69 4629.1,6012.69 4629.1,5977.26 4593.66,5977.26 4593.66,6012.69 4522.79,6012.69 4522.79,5977.26 4558.23,5977.26 4558.23,5906.4 4522.79,5906.4 4522.79,5941.83 4487.36,5941.83 4487.36,5906.4 4451.92,5906.4 4451.92,5977.26 4487.36,5977.26 4487.36,6012.7 4451.92,6012.7 4451.92,6048.13 4451.92,6083.56 4487.36,6083.56 4487.36,6048.13 4558.23,6048.13 4558.23,6083.56 4522.8,6083.56 4522.8,6119 4558.23,6119 4558.23,6154.44 4487.36,6154.44 4487.36,6119 4451.93,6119 4451.93,6189.86 4487.36,6189.86 4487.36,6225.3 4451.93,6225.3 4451.93,6296.16 4487.36,6296.16 4487.36,6260.73 4522.79,6260.73 4522.79,6296.16 4558.23,6296.16 4558.23,6225.3 4522.79,6225.3 4522.79,6189.86 4593.67,6189.86 4629.1,6189.86 4629.1,6225.29 4593.66,6225.29 4593.66,6296.16 4629.1,6296.16 4629.1,6260.73 4664.53,6260.73 4664.53,6296.16 4699.97,6296.16 4699.97,6225.29 4664.53,6225.29 4664.53,6189.85 4699.97,6189.85 4699.97,6118.99 4664.52,6118.99 4664.52,6154.43 4593.66,6154.43 4593.66,6118.99 4629.09,6118.99 4629.09,6083.56 4593.66,6083.56 4593.66,6048.13 4664.52,6048.13 4664.52,6083.56 4699.96,6083.56 4699.95,6048.13 4735.39,6048.13 4735.39,6083.56 4770.83,6083.56 4770.83,6048.13 4841.69,6048.13 4841.69,6083.56 4806.26,6083.56 4806.26,6118.99 4841.69,6118.99 4841.69,6154.43 4770.83,6154.43 4770.83,6118.99 4735.39,6118.99 4735.39,6189.86 4770.82,6189.86 4770.82,6225.29 4735.39,6225.29 4735.39,6296.16 4770.82,6296.16 4770.82,6260.72 4806.26,6260.72 4806.26,6296.16 4841.69,6296.16 4841.69,6225.29 4806.26,6225.29 4806.26,6189.85 4877.12,6189.85 4912.56,6189.85 4912.56,6225.29 4877.12,6225.29 4877.12,6296.15 4912.56,6296.15 4912.56,6260.72 4947.99,6260.72 4947.99,6296.15 4983.42,6296.15 4983.42,6225.29 4947.99,6225.29 4947.99,6189.85 4983.42,6189.85 4983.42,6118.98 4947.98,6118.98 4947.98,6154.41 4877.12,6154.41 4877.12,6118.98 4912.55,6118.98 4912.55,6083.55 4877.12,6083.55 4877.12,6048.11 4947.98,6048.11 4947.98,6083.55 4983.42,6083.55 4983.42,6012.68 4947.98,6012.69 4947.98,5977.25 4983.42,5977.25 4983.42,5906.39 4947.98,5906.39 4947.98,5941.81 4912.55,5941.81 4912.55,5906.39 4877.12,5906.39 4877.12,5977.25 4912.55,5977.25 4912.55,6012.69 4841.69,6012.69 4841.68,5977.26 4806.24,5977.26 4806.24,6012.69 4735.38,6012.69 4735.38,5977.26 4770.81,5977.26 4770.81,5941.82 4735.38,5941.82 4735.38,5906.39 4806.24,5906.39 4806.24,5941.82 4841.68,5941.82 4841.68,5906.39 4841.68,5835.52 4806.24,5835.52 4806.24,5870.96 4735.38,5870.96 4735.38,5835.52 4770.81,5835.52 4770.81,5800.09 4735.38,5800.09 4735.38,5764.66 4806.24,5764.66 4806.24,5800.09 4841.67,5800.09 4841.67,5764.66 4912.54,5764.66 4912.54,5800.09 4877.11,5800.09 4877.11,5870.96 4912.54,5870.96 4912.54,5835.53 4947.97,5835.53 4947.97,5870.96 4983.41,5870.96 4983.41,5800.09 4947.97,5800.09 4947.97,5764.65 4983.41,5764.65 4983.41,5729.23 4983.41,5693.79 4947.97,5693.79 4947.97,5729.23 4877.1,5729.23 4877.1,5693.79 4912.53,5693.79 4912.53,5658.36 4877.1,5658.36 4877.1,5622.93 4947.97,5622.93 4947.97,5658.36 4983.4,5658.36 4983.4,5587.49 4947.97,5587.49 4947.97,5552.06 4983.4,5552.06 4983.4,5481.19 4947.97,5481.19 4947.97,5516.63 4912.54,5516.63 4912.54,5481.19 4877.1,5481.19 4877.1,5552.06 4912.54,5552.06 4912.54,5587.5 4841.67,5587.5 4806.24,5587.5 4806.24,5552.06 4841.67,5552.06 4841.67,5481.2 4806.24,5481.2 4806.24,5516.63 4770.8,5516.63 4770.8,5481.2 4735.37,5481.2 4735.37,5552.06 4770.8,5552.06 4770.8,5587.5 4735.37,5587.5 4735.37,5658.37 4770.81,5658.37 4770.81,5622.94 4841.67,5622.94 4841.67,5658.37 4806.24,5658.37 4806.24,5693.8 4841.67,5693.8 4841.67,5729.23 4770.81,5729.23 4770.81,5693.8 4735.38,5693.8 4735.38,5729.23 4664.51,5729.23 4664.51,5693.8 4699.94,5693.8 4699.94,5622.94 4664.51,5622.94 4664.51,5658.37 4629.08,5658.37 4629.08,5622.94 4593.65,5622.94 4593.65,5693.8 4629.08,5693.8 4629.08,5729.24 4558.22,5729.24 4558.21,5693.81 4522.77,5693.81 4522.77,5729.24 4451.91,5729.24 4451.91,5693.81 4487.34,5693.81 4487.34,5658.38 4451.91,5658.38 4451.91,5622.94 4522.77,5622.94 4522.77,5658.38 4558.21,5658.38 4558.21,5622.94 4558.21,5552.08 4522.77,5552.08 4522.77,5587.51 4451.9,5587.51 4451.9,5552.08 4487.33,5552.08 4487.33,5516.64 4451.9,5516.64 4451.9,5481.21 4522.77,5481.21 4522.77,5516.64 4558.2,5516.64 4558.2,5481.21 4629.07,5481.21 4629.07,5516.64 4593.64,5516.64 4593.64,5587.51 4629.07,5587.51 4629.07,5552.08 4664.5,5552.08 4664.5,5587.51 4699.94,5587.51 4699.94,5516.64 4664.5,5516.64 4664.5,5481.21 4699.94,5481.21 4699.94,5445.77 4664.51,5445.77 4664.51,5410.34 4699.94,5410.34 4699.94,5339.48 4664.51,5339.48 4664.51,5374.91 4629.07,5374.91 4629.07,5339.48 4593.64,5339.48 4593.64,5410.34 4629.07,5410.34 4629.07,5445.78 4558.21,5445.78 4558.21,5410.35 4522.76,5410.35 4522.76,5445.78 4451.9,5445.78 4451.9,5410.35 4487.33,5410.35 4487.33,5374.91 4451.9,5374.91 4451.9,5339.48 4522.76,5339.48 4522.76,5374.91 4558.2,5374.91 4558.2,5339.48 4558.2,5268.61 4522.76,5268.61 4522.76,5304.05 4451.89,5304.05 4451.89,5268.61 4487.33,5268.61 4487.33,5233.19 4451.89,5233.19 4451.89,5197.75 4522.76,5197.75 4522.76,5233.19 4558.2,5233.19 4558.2,5197.75 4629.06,5197.75 4629.06,5233.19 4593.63,5233.19 4593.63,5304.05 4629.06,5304.05 4629.06,5268.62 4664.5,5268.62 4664.5,5304.05 4699.93,5304.05 4699.93,5233.19 4664.5,5233.19 4664.5,5197.74 4699.93,5197.74 4735.36,5197.74 4735.36,5233.18 4770.8,5233.18 4770.8,5197.74 4841.66,5197.74 4841.66,5233.18 4806.23,5233.18 4806.23,5268.61 4841.66,5268.61 4841.66,5304.05 4770.8,5304.05 4770.8,5268.61 4735.37,5268.61 4735.37,5339.48 4770.8,5339.48 4770.8,5374.91 4735.36,5374.91 4735.36,5445.77 4770.8,5445.77 4770.8,5410.35 4806.23,5410.35 4806.23,5445.77 4841.66,5445.77 4841.66,5374.91 4806.23,5374.91 4806.23,5339.47 4877.1,5339.47 4912.53,5339.47 4912.53,5374.91 4877.09,5374.91 4877.09,5445.77 4912.53,5445.77 4912.53,5410.34 4947.96,5410.34 4947.96,5445.77 4983.4,5445.77 4983.4,5374.91 4947.96,5374.91 4947.96,5339.47 4983.4,5339.47 4983.4,5268.6 4947.96,5268.6 4947.96,5304.04 4877.09,5304.04 4877.09,5268.6 4912.52,5268.6 4912.52,5233.17 4877.09,5233.17 4877.09,5197.73 4947.96,5197.73 4947.96,5233.17 4983.39,5233.17 4983.39,5197.74 5018.82,5197.74 5018.82,5233.17 5054.26,5233.17 5054.26,5197.74 5125.12,5197.74 5125.12,5233.17 5089.69,5233.17 5089.69,5268.6 5125.12,5268.6 5125.12,5304.04 5054.26,5304.04 5054.26,5268.6 5018.82,5268.6 5018.82,5339.47 5054.26,5339.47 5054.26,5374.91 5018.82,5374.91 5018.82,5445.77 5054.26,5445.77 5054.26,5410.34 5089.69,5410.34 5089.69,5445.77 5125.12,5445.77 5125.12,5374.91 5089.69,5374.91 5089.69,5339.46 5160.56,5339.46 5195.98,5339.46 5195.98,5374.9 5160.55,5374.9 5160.55,5445.76 5195.98,5445.76 5195.98,5410.33 5231.42,5410.33 5231.42,5445.76 5266.85,5445.76 5266.85,5374.9 5231.42,5374.9 5231.42,5339.46 5266.85,5339.46 5266.85,5268.6 5231.41,5268.6 5231.41,5304.03 5160.55,5304.03 5160.55,5268.6 5195.98,5268.6 5195.98,5233.16 5160.55,5233.16 5160.55,5197.73 5231.41,5197.73 5231.41,5233.16 5266.85,5233.16 5266.84,5197.73 5337.71,5197.73 5337.71,5233.16 5302.28,5233.16 5302.28,5304.02 5337.71,5304.02 5337.71,5268.6 5373.14,5268.6 5373.14,5304.02 5408.58,5304.02 5408.58,5233.16 5373.14,5233.16 5373.14,5197.72 5444.01,5197.72 5444.01,5233.16 5479.45,5233.16 5479.45,5197.72 5550.31,5197.72 5550.31,5233.16 5514.88,5233.16 5514.88,5268.59 5550.31,5268.59 5550.31,5304.02 5479.45,5304.02 5479.45,5268.59 5444.02,5268.59 5444.02,5304.02 5444.02,5374.89 5479.46,5374.89 5479.46,5339.45 5550.32,5339.45 5550.32,5374.89 5514.89,5374.89 5514.89,5410.32 5550.32,5410.32 5550.32,5445.75 5479.46,5445.75 5479.46,5410.32 5444.02,5410.32 5444.02,5445.75 5373.15,5445.75 5373.15,5410.32 5408.59,5410.32 5408.59,5339.45 5373.15,5339.45 5373.15,5374.88 5337.72,5374.88 5337.72,5339.45 5302.29,5339.45 5302.29,5410.32 5337.72,5410.32 5337.72,5445.76 5302.29,5445.76 5302.29,5481.19 5337.72,5481.19 5337.72,5516.62 5302.28,5516.62 5302.28,5587.48 5337.72,5587.48 5337.72,5552.05 5373.15,5552.05 5373.15,5587.48 5408.59,5587.48 5408.59,5516.62 5373.15,5516.62 5373.15,5481.18 5444.02,5481.18 5444.02,5516.61 5479.46,5516.61 5479.46,5481.18 5550.32,5481.18 5550.32,5516.61 5514.89,5516.61 5514.89,5552.05 5550.32,5552.05 5550.32,5587.48 5479.46,5587.48 5479.46,5552.05 5444.02,5552.05 5444.02,5587.48 5444.02,5658.35 5479.46,5658.35 5479.46,5622.92 5550.33,5622.92 5550.33,5658.35 5514.9,5658.35 5514.9,5693.78 5550.33,5693.78 5550.33,5729.22 5479.46,5729.22 5479.46,5693.78 5444.03,5693.78 5444.03,5729.21 5373.16,5729.21 5373.16,5693.78 5408.6,5693.78 5408.6,5622.92 5373.16,5622.92 5373.16,5658.35 5337.73,5658.35 5337.73,5622.92 5302.29,5622.92 5302.29,5693.78 5337.73,5693.78 5337.73,5729.22 5302.29,5729.22 5266.86,5729.22 5266.86,5693.78 5231.42,5693.78 5231.42,5729.22 5160.56,5729.22 5160.56,5693.78 5195.99,5693.78 5195.99,5658.35 5160.56,5658.35 5160.56,5622.92 5231.42,5622.92 5231.42,5658.35 5266.85,5658.35 5266.85,5587.48 5231.42,5587.48 5231.42,5552.05 5266.86,5552.05 5266.86,5481.18 5231.42,5481.18 5231.42,5516.61 5195.99,5516.61 5195.99,5481.18 5160.56,5481.18 5160.56,5552.05 5195.99,5552.05 5195.99,5587.49 5125.13,5587.49 5089.7,5587.49 5089.7,5552.05 5125.13,5552.05 5125.13,5481.19 5089.7,5481.19 5089.7,5516.62 5054.26,5516.62 5054.26,5481.19 5018.83,5481.19 5018.83,5552.05 5054.26,5552.05 5054.26,5587.5 5018.83,5587.5 5018.83,5658.36 5054.27,5658.36 5054.27,5622.93 5125.13,5622.93 5125.13,5658.36 5089.7,5658.36 5089.7,5693.8 5125.13,5693.8 5125.13,5729.23 5054.27,5729.23 5054.27,5693.8 5018.83,5693.8 5018.84,5764.66 5054.27,5764.66 5054.27,5800.09 5018.83,5800.09 5018.83,5870.95 5054.27,5870.95 5054.27,5835.52 5089.7,5835.52 5089.7,5870.95 5125.14,5870.95 5125.14,5800.09 5089.7,5800.09 5089.7,5764.65 5160.56,5764.65 5160.56,5800.09 5196.01,5800.09 5196.01,5764.65 5266.87,5764.65 5266.87,5800.09 5231.44,5800.09 5231.44,5835.52 5266.87,5835.52 5266.87,5870.95 5196.01,5870.95 5196.01,5835.52 5160.57,5835.52 5160.57,5870.95 5160.57,5941.81 5196.01,5941.81 5196.01,5906.38 5266.87,5906.38 5266.87,5941.81 5231.44,5941.81 5231.44,5977.25 5266.87,5977.25 5266.87,6012.68 5196.01,6012.68 5196.01,5977.25 5160.57,5977.25 5160.57,6012.68 5089.71,6012.68 5089.71,5977.25 5125.15,5977.25 5125.15,5906.38 5089.71,5906.38 5089.71,5941.81 5054.28,5941.81 5054.28,5906.38 5018.84,5906.38 5018.84,5977.25 5054.28,5977.25 5054.28,6012.69 5018.84,6012.69 5018.84,6048.11 5018.84,6083.55 5054.28,6083.55 5054.28,6048.12 5125.15,6048.12 5125.15,6083.55 5089.72,6083.55 5089.72,6118.98 5125.15,6118.98 5125.15,6154.42 5054.28,6154.42 5054.28,6118.98 5018.85,6118.98 5018.85,6189.85 5054.28,6189.85 5054.28,6225.29 5018.85,6225.29 5018.85,6296.15 5054.28,6296.15 5054.28,6260.72 5089.71,6260.72 5089.71,6296.15 5125.15,6296.15 5125.15,6225.29 5089.71,6225.29 5089.71,6189.85 5160.58,6189.85 5196.01,6189.85 5196.01,6225.28 5160.57,6225.28 5160.57,6296.14 5196.01,6296.14 5196.01,6260.71 5231.44,6260.71 5231.44,6296.14 5266.88,6296.14 5266.88,6225.28 5231.44,6225.28 5231.44,6189.84 5266.88,6189.84 5266.88,6118.98 5231.44,6118.98 5231.44,6154.41 5160.57,6154.41 5160.57,6118.98 5196.01,6118.98 5196.01,6083.55 5160.57,6083.55 5160.57,6048.11 5231.44,6048.11 5231.44,6083.55 5266.87,6083.55 5266.87,6048.11 5302.3,6048.11 5302.3,6083.55 5337.74,6083.55 5337.74,6048.11 5408.61,6048.11 5408.61,6083.55 5373.17,6083.55 5373.17,6118.98 5408.61,6118.98 5408.61,6154.41 5337.74,6154.41 5337.74,6118.98 5302.31,6118.98 5302.31,6189.85 5337.74,6189.85 5337.74,6225.28 5302.3,6225.28 5302.3,6296.14 5337.74,6296.14 5337.74,6260.71 5373.17,6260.71 5373.17,6296.14 5408.61,6296.14 5408.61,6225.28 5373.17,6225.28 5373.17,6189.84 5444.04,6189.84 5479.47,6189.84 5479.47,6225.27 5444.04,6225.27 5444.04,6296.13 5479.47,6296.13 5479.47,6260.71 5514.9,6260.71 5514.9,6296.13 5550.34,6296.13 5550.34,6225.27 5514.9,6225.27 5514.9,6189.84 5550.34,6189.84 5550.34,6118.97 5514.9,6118.97 5514.9,6154.4 5444.04,6154.4 5444.04,6118.97 5479.47,6118.97 5479.47,6083.54 5444.04,6083.54 5444.04,6048.1 5514.9,6048.1 5514.9,6083.54 5550.33,6083.54 5550.33,6012.67 5514.9,6012.67 5514.9,5977.23 5550.33,5977.23 5550.33,5906.38 5514.9,5906.38 5514.9,5941.8 5479.47,5941.8 5479.47,5906.38 5444.03,5906.38 5444.03,5977.23 5479.47,5977.23 5479.47,6012.68 5408.6,6012.68 5408.6,5977.24 5373.16,5977.24 5373.16,6012.68 5302.3,6012.68 5302.3,5977.24 5337.73,5977.24 5337.73,5941.81 5302.3,5941.81 5302.3,5906.38 5373.16,5906.38 5373.16,5941.81 5408.59,5941.81 5408.59,5906.38 5408.59,5835.51 5373.15,5835.51 5373.15,5870.95 5302.29,5870.95 5302.29,5835.51 5337.72,5835.51 5337.72,5800.08 5302.29,5800.08 5302.29,5764.65 5373.15,5764.65 5373.15,5800.08 5408.59,5800.08 5408.59,5764.65 5479.46,5764.65 5479.46,5800.08 5444.02,5800.08 5444.02,5870.95 5479.46,5870.95 5479.46,5835.51 5514.89,5835.51 5514.89,5870.95 5550.32,5870.95 5550.32,5800.08 5514.89,5800.08 5514.89,5764.64 5550.32,5764.64 5621.19,5764.64 5621.19,5800.07 5585.75,5800.07 5585.75,5870.93 5621.19,5870.93 5621.19,5835.5 5656.62,5835.5 5656.62,5870.93 5692.06,5870.93 5692.06,5800.07 5656.62,5800.07 5656.62,5764.63 5727.49,5764.63 5727.49,5800.06 5762.93,5800.06 5762.93,5764.63 5833.79,5764.63 5833.79,5800.06 5798.36,5800.06 5798.36,5835.5 5833.79,5835.5 5833.79,5870.93 5762.93,5870.93 5762.93,5835.5 5727.49,5835.5 5727.49,5870.92 5727.49,5941.8 5762.93,5941.8 5762.93,5906.36 5833.8,5906.36 5833.8,5941.8 5798.37,5941.8 5798.37,5977.23 5833.8,5977.23 5833.8,6012.66 5762.93,6012.66 5762.93,5977.23 5727.5,5977.23 5727.5,6012.65 5656.63,6012.65 5656.63,5977.22 5692.07,5977.22 5692.07,5906.36 5656.63,5906.36 5656.63,5941.8 5621.19,5941.8 5621.19,5906.36 5585.76,5906.36 5585.76,5977.22 5621.19,5977.22 5621.19,6012.67 5585.76,6012.67 5585.76,6048.09 5585.76,6083.53 5621.2,6083.53 5621.2,6048.1 5692.07,6048.1 5692.07,6083.53 5656.63,6083.53 5656.63,6118.96 5692.07,6118.96 5692.07,6154.4 5621.2,6154.4 5621.2,6118.96 5585.77,6118.96 5585.77,6189.83 5621.2,6189.83 5621.2,6225.27 5585.77,6225.27 5585.77,6296.13 5621.2,6296.13 5621.2,6260.7 5656.63,6260.7 5656.63,6296.13 5692.07,6296.13 5692.07,6225.27 5656.63,6225.27 5656.63,6189.82 5727.5,6189.82 5762.93,6189.82 5762.93,6225.26 5727.5,6225.26 5727.5,6296.12 5762.93,6296.12 5762.93,6260.69 5798.37,6260.69 5798.37,6296.12 5833.8,6296.12 5833.8,6225.26 5798.37,6225.26 5798.37,6189.82 5833.8,6189.82 5833.8,6118.96 5798.36,6118.96 5798.36,6154.39 5727.5,6154.39 5727.5,6118.96 5762.93,6118.96 5762.93,6083.52 5727.5,6083.52 5727.5,6048.09 5798.36,6048.09 5798.36,6083.52 5833.8,6083.52 5833.79,6048.09 5869.23,6048.09 5869.23,6083.52 5904.67,6083.52 5904.67,6048.09 5975.53,6048.09 5975.53,6083.52 5940.1,6083.52 5940.1,6118.96 5975.53,6118.96 5975.53,6154.39 5904.67,6154.39 5904.67,6118.96 5869.23,6118.96 5869.23,6189.82 5904.66,6189.82 5904.66,6225.26 5869.23,6225.26 5869.23,6296.12 5904.66,6296.12 5904.66,6260.69 5940.1,6260.69 5940.1,6296.12 5975.53,6296.12 5975.53,6225.26 5940.1,6225.26 5940.1,6189.82 6010.96,6189.82 6046.4,6189.82 6046.4,6225.26 6010.96,6225.26 6010.96,6296.11 6046.4,6296.11 6046.4,6260.69 6081.82,6260.69 6081.82,6296.11 6117.26,6296.11 6117.26,6225.26 6081.82,6225.26 6081.82,6189.81 6117.26,6189.81 6117.26,6118.94 6081.82,6118.94 6081.82,6154.38 6010.96,6154.38 6010.96,6118.94 6046.39,6118.94 6046.39,6083.51 6010.96,6083.51 6010.96,6048.08 6081.82,6048.08 6081.82,6083.51 6117.26,6083.51 6117.26,6012.65 6081.82,6012.65 6081.82,5977.21 6117.26,5977.21 6117.26,5906.35 6081.82,5906.35 6081.82,5941.78 6046.39,5941.78 6046.39,5906.35 6010.96,5906.35 6010.96,5977.21 6046.39,5977.21 6046.39,6012.65 5975.53,6012.65